# EAGLE board asset-tracker (EAGLE 7.5.0)
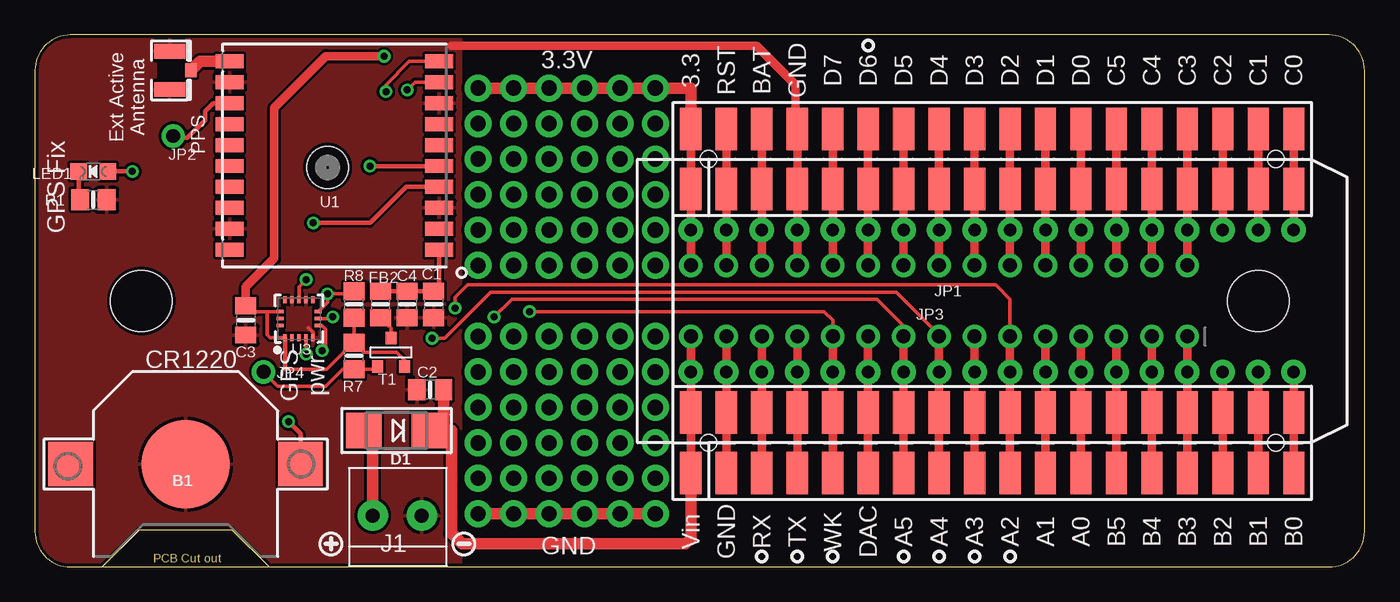
[diagram p0: board, top side]
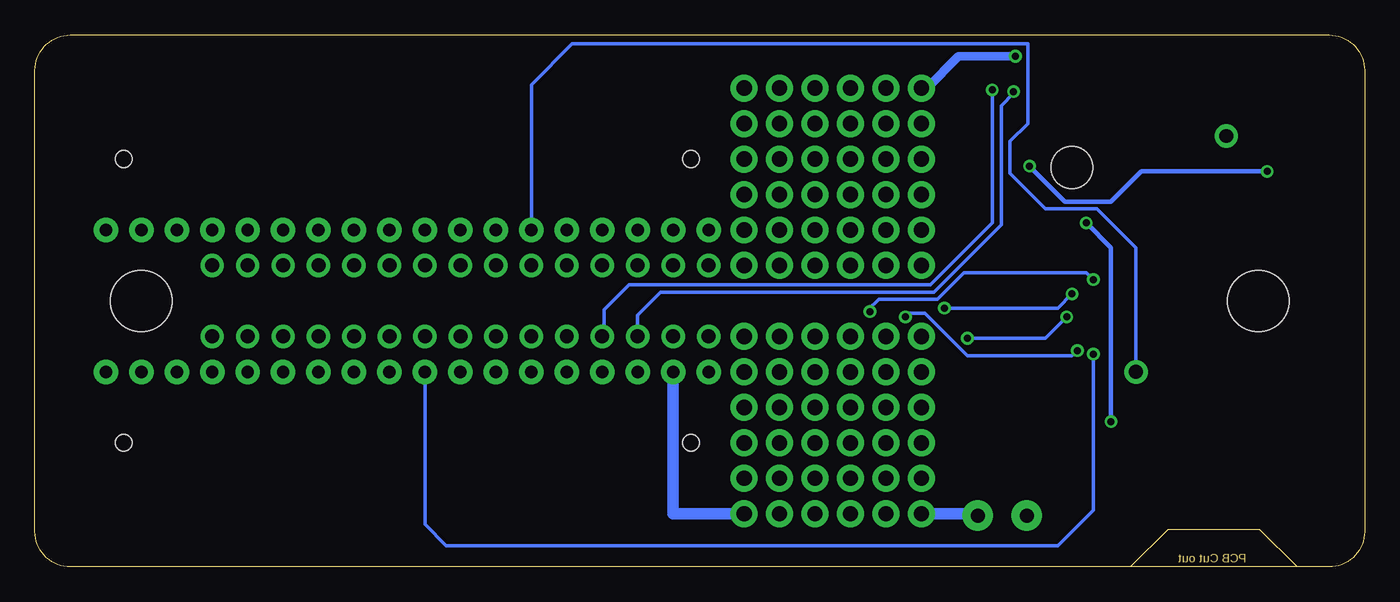
[diagram p1: board, bottom side, seen from below]

Size 95.25 x 38.1 mm. Coordinates in mm from the lower left corner, seen from the top.
Outline: 4.83,0 2.54,0 arc-90 0,2.54 0,35.56 arc-90 2.54,38.1 92.71,38.1 arc-90 95.25,35.56 95.25,2.54 arc-90 92.71,0 16.76,0
Outline: 4.83,0 16.76,0
Outline: 4.83,0 7.49,2.67 14.1,2.67 16.76,0
Copper layers (1*16): Top 0.035mm / dielectric 1.5mm / Bottom 0.035mm
Design rules "adafruit *": minimum track width 8mil, minimum drill 15.5mil, track to track 8mil, track to pad 8mil, pad to pad 8mil, via to via 8mil, smd to smd 8mil, copper to edge 10mil, drill to drill 8mil, minimum pad ring 10mil, minimum via ring 8mil, stop-mask expansion 2mil, vias tented up to drill 20mil, thermal gap 10mil
Holes 4.4 mm at 7.62,19.05 87.63,19.05

## Footprints (pad centres in the part's own frame; a part is rotated, then mirrored left to right if it is on the bottom)
CR1220 = smd 3.2 x 3.2: +$1 -8.225,0; +$2 8.225,0 | smd 6.35 x 6.35: - 0,0
0805-NO@1 = smd 1.24 x 1.5: 1 -0.95,0; 2 0.95,0
0805_10MGAP = smd 1.2 x 1.5: 1 -1.05,0; 2 1.05,0
SMADIODE = smd 2.54 x 2.54: A 2.349,0; C -2.349,0
1X2-3.5MM = drill 1 pad 2.184: 1 1.8,0; 2 -1.7,0
1X15_ROUND_70 = drill 1 pad 1.676: 1 -17.78,0; 2 -15.24,0; 3 -12.7,0; 4 -10.16,0; 5 -7.62,0; 6 -5.08,0; 7 -2.54,0; 8 0,0; 9 2.54,0; 10 5.08,0; 11 7.62,0; 12 10.16,0; 13 12.7,0; 14 15.24,0; 15 17.78,0
1X01_ROUND = drill 1 pad 1.676: 1 0,0
CHIPLED_0805_NOOUTLINE = smd 1.2 x 1.2: A 0,-1.05; C 0,1.05
0805-NO = smd 1.3 x 1.5: 1 -0.95,0; 2 0.95,0
SOT-23 = smd 0.787 x 0.889: 1 0.025,-1.016; 2 -0.94,1.016; 3 0.991,1.016
FGPMMOPA6H = smd 2 x 1: P$1 -7.5,6.75; P$2 -7.5,5.25; P$3 -7.5,3.75; P$4 -7.5,2.25; P$5 -7.5,0.75; P$6 -7.5,-0.75; P$7 -7.5,-2.25; P$8 -7.5,-3.75; P$9 -7.5,-5.25; P$10 -7.5,-6.75; P$11 7.5,-6.75; P$12 7.5,-5.25; P$13 7.5,-3.75; P$14 7.5,-2.25; P$15 7.5,-0.75; P$16 7.5,0.75; P$17 7.5,2.25; P$18 7.5,3.75; P$19 7.5,5.25; P$20 7.5,6.75 | hole 3: 0.5,0.85
LGA16_3X3MM = smd 0.5 x 0.25: 1 -1.35,1; 2 -1.35,0.5; 3 -1.35,0; 4 -1.35,-0.5; 5 -1.35,-1; 9 1.35,-1; 10 1.35,-0.5; 11 1.35,0; 12 1.35,0.5; 13 1.35,1 | smd 0.25 x 0.5: 6 -0.5,-1.35; 7 0,-1.35; 8 0.5,-1.35; 14 0.5,1.35; 15 0,1.35; 16 -0.5,1.35
ELECTRON_SMT = smd 3.048 x 1.524: 1A -12.319,21.59; 1B -8.001,21.59; 2A -12.319,19.05; 2B -8.001,19.05; 3A -12.319,16.51; 3B -8.001,16.51; 4A -12.319,13.97; 4B -8.001,13.97; 5A -12.319,11.43; 5B -8.001,11.43; 6A -12.319,8.89; 6B -8.001,8.89; 7A -12.319,6.35; 7B -8.001,6.35; 8A -12.319,3.81; 8B -8.001,3.81; 9A -12.319,1.27; 9B -8.001,1.27; 10A -12.319,-1.27; 10B -8.001,-1.27; 11A -12.319,-3.81; 11B -8.001,-3.81; 12A -12.319,-6.35; 12B -8.001,-6.35; 13A -12.319,-8.89; 13B -8.001,-8.89; 14A -12.319,-11.43; 14B -8.001,-11.43; 15A -12.319,-13.97; 15B -8.001,-13.97; 16A -12.319,-16.51; 16B -8.001,-16.51; 17A -12.319,-19.05; 17B -8.001,-19.05; 18A -12.319,-21.59; 18B -8.001,-21.59; 19A 12.319,-21.59; 19B 8.001,-21.59; 20A 12.319,-19.05; 20B 8.001,-19.05; 21A 12.319,-16.51; 21B 8.001,-16.51; 22A 12.319,-13.97; 22B 8.001,-13.97; 23A 12.319,-11.43; 23B 8.001,-11.43; 24A 12.319,-8.89; 24B 8.001,-8.89; 25A 12.319,-6.35; 25B 8.001,-6.35; 26A 12.319,-3.81; 26B 8.001,-3.81; 27A 12.319,-1.27; 27B 8.001,-1.27; 28A 12.319,1.27; 28B 8.001,1.27; 29A 12.319,3.81; 29B 8.001,3.81; 30A 12.319,6.35; 30B 8.001,6.35; 31A 12.319,8.89; 31B 8.001,8.89; 32A 12.319,11.43; 32B 8.001,11.43; 33A 12.319,13.97; 33B 8.001,13.97; 34A 12.319,16.51; 34B 8.001,16.51; 35A 12.319,19.05; 35B 8.001,19.05; 36A 12.319,21.59; 36B 8.001,21.59 | drill 0.889 pad 1.753: 1C -5.08,21.59; 2C -5.08,19.05; 3C -5.08,16.51; 4C -5.08,13.97; 5C -5.08,11.43; 6C -5.08,8.89; 7C -5.08,6.35; 8C -5.08,3.81; 9C -5.08,1.27; 10C -5.08,-1.27; 11C -5.08,-3.81; 12C -5.08,-6.35; 13C -5.08,-8.89; 14C -5.08,-11.43; 15C -5.08,-13.97; 16C -5.08,-16.51; 17C -5.08,-19.05; 18C -5.08,-21.59; 19C 5.08,-21.59; 20C 5.08,-19.05; 21C 5.08,-16.51; 22C 5.08,-13.97; 23C 5.08,-11.43; 24C 5.08,-8.89; 25C 5.08,-6.35; 26C 5.08,-3.81; 27C 5.08,-1.27; 28C 5.08,1.27; 29C 5.08,3.81; 30C 5.08,6.35; 31C 5.08,8.89; 32C 5.08,11.43; 33C 5.08,13.97; 34C 5.08,16.51; 35C 5.08,19.05; 36C 5.08,21.59 | hole 1.2: -10.16,20.32; 10.16,20.32; 10.16,-20.32; -10.16,-20.32
U.FL = smd 2.2 x 1.05: 1 0,1.375; 2 0,-1.375 | smd 0.8 x 1: 3 1.525,0

## Placement (x,y rotation side)
B1  CR1220  [CR1220]  10.79,7.37 180 top
C1  0.1uF  [0805-NO@1]  28.57,18.8 270 top
C2  10uF  [0805-NO@1]  28.32,12.7 180 top
C3  0.1uF  [0805_10MGAP]  15.11,17.65 270 top
C4  10uF  [0805-NO@1]  26.67,18.8 270 top
D1  [SMADIODE]  25.91,9.78 180 top
FB2  Ferrite  [0805-NO@1]  24.77,18.8 270 top
J1  1X2-3.5MM  [1X2-3.5MM]  25.91,3.68 0 top
JP1  [1X15_ROUND_70]  64.77,21.59 0 top
JP2  [1X01_ROUND]  9.91,30.86 0 top
JP3  [1X15_ROUND_70]  64.77,16.51 180 top
JP4  [1X01_ROUND]  16.38,13.97 0 top
LED1  RED  [CHIPLED_0805_NOOUTLINE]  4.19,28.32 90 top
R1  470-1K  [0805-NO]  4.19,26.29 180 top
R7  10K  [0805-NO]  22.86,15.11 90 top
R8  10K  [0805-NO]  22.86,18.8 270 top
T1  DMG3415  [SOT-23]  25.53,15.37 180 top
U1  FGPMMOPA6H  [FGPMMOPA6H]  21.46,29.46 180 top
U3  LIS3DHTR  [LGA16_3X3MM]  18.92,17.78 90 top
U$13  [SYMBOL_MINUS]  30.73,1.65 0 top
U$21  [SYMBOL_PLUS]  21.21,1.65 0 top
X1  ELECTRON  [ELECTRON_SMT]  68.58,19.05 90 top
X2  uFL  [U.FL]  9.65,35.56 0 top

## Library data of the parts
B1 C1-C4 D1 FB2 JP1-JP4 LED1 R1 R7 R8 U1 U3 U$13 U$21 X1 X2 = microbuilder
J1 = adafruit2
T1 = zetex; OC_FARNELL: unknown; OC_NEWARK: unknown

## Nets
1PPS: JP2.1 U1.P$13
3.3V: C3.1 JP1.1 R7.2 R8.2 T1.2 U3.1 U3.14 X1.36A X1.36B X1.36C
A0: JP3.4 X1.12A X1.12B X1.12C
A1: JP3.5 X1.11A X1.11B X1.11C
ACCEL_CS: JP3.6 R8.1 U3.8 X1.10A X1.10B X1.10C
ACCEL_INT1: JP3.11 U3.11 X1.5A X1.5B X1.5C
ACCEL_MISO: JP3.8 U3.7 X1.8A X1.8B X1.8C
ACCEL_MOSI: JP3.9 U3.6 X1.7A X1.7B X1.7C
ACCEL_SCK: JP3.7 U3.4 X1.9A X1.9B X1.9C
B3: JP3.1 X1.15A X1.15B X1.15C
B4: JP3.2 X1.14A X1.14B X1.14C
B5: JP3.3 X1.13A X1.13B X1.13C
C3: JP1.15 X1.22A X1.22B X1.22C
C4: JP1.14 X1.23A X1.23B X1.23C
C5: JP1.13 X1.24A X1.24B X1.24C
D0: JP1.12 X1.25A X1.25B X1.25C
D1: JP1.11 X1.26A X1.26B X1.26C
D2: JP1.10 X1.27A X1.27B X1.27C
D3: JP1.9 X1.28A X1.28B X1.28C
D4: JP1.8 X1.29A X1.29B X1.29C
D5: JP1.7 X1.30A X1.30B X1.30C
D6: JP1.6 JP4.1 R7.1 T1.3 X1.31A X1.31B X1.31C
D7: JP1.5 X1.32A X1.32B X1.32C
DAC: JP3.10 X1.6A X1.6B X1.6C
FIX: LED1.A U1.P$5
GND: B1.- C1.2 C2.2 C3.2 C4.2 J1.1 JP1.4 JP3.14 R1.1 U1.P$3 U1.P$8 U1.P$12 U1.P$19 U3.5 U3.10 U3.12 X1.2A X1.2B X1.2C X1.33A X1.33B X1.33C X2.1 X2.2
N$1: C1.1 C4.1 FB2.1 U1.P$1
N$2: LED1.C R1.2
N$4: U1.P$11 X2.3
N$8: C2.1 D1.C JP3.15 X1.1A X1.1B X1.1C
N$9: D1.A J1.2
N$10: X1.16A X1.16B X1.16C
N$11: X1.17A X1.17B X1.17C
N$12: X1.18A X1.18B X1.18C
N$13: X1.21A X1.21B X1.21C
N$14: X1.20A X1.20B X1.20C
N$15: X1.19A X1.19B X1.19C
RST: JP1.2 X1.35A X1.35B X1.35C
RX: JP3.13 U1.P$10 X1.3A X1.3B X1.3C
TX: JP3.12 U1.P$9 X1.4A X1.4B X1.4C
VBACKUP: B1.+$1 U1.P$4
VBAT: JP1.3 X1.34A X1.34B X1.34C
VCC: FB2.2 T1.1

## Tracks (layer width: path | path; a pad name or v marks a point on that pad's centre or on a via)
1PPS
  Top 0.305: U1.P$13 12.77,33.21 12.19,32.64 12.19,32 10.92,30.73 10.03,30.73 JP2.1
3.3V  (via drill 0.5, 1.1 pad 1.93)
  Top 0.254: U3.14 16.64,18.28 | 16.64,18.28 15.54,18.28 C3.1 | U3.1 16.84,16.43 16.64,16.64 16.64,18.28 | R8.2 R7.2 | R7.2 23.56,15.37 25.91,15.37 26.47,14.81 T1.2 | R7.2 22.79,16.06 20.89,14.16 17.92,14.16
  Top 0.305: U3.1 17.92,14.16
  Top 0.61: X1.36A X1.36B X1.36C JP1.1 | C3.1 15.11,20.07 17.14,22.1 17.14,32.89 20.83,36.58 v25.02,36.58
  Top 0.813: v31.75,34.29 v34.29,34.29 v36.83,34.29 v39.37,34.29 v41.91,34.29 v44.45,34.29 46.99,34.29 X1.36A
  Bottom 0.61: v31.75,34.29 31.37,34.29 29.08,36.58 v25.02,36.58
A0
  Top 0.61: X1.12A X1.12B X1.12C JP3.4
A1
  Top 0.61: JP3.5 X1.11C X1.11B X1.11A
ACCEL_CS  (via drill 0.5)
  Top 0.254: 22.23,19.68 22.35,19.68 | 22.35,19.68 22.8,19.68 R8.1 | 22.35,19.68 22.23,19.56 v20.95,19.56 20.95,18.96 U3.8 | JP3.6 69.85,19.18 68.83,20.19 30.99,20.19 30.1,19.3 v30.1,18.54
  Top 0.61: X1.10A X1.10B X1.10C JP3.6
  Bottom 0.254: v20.95,19.56 21.97,18.54 v30.1,18.54
ACCEL_INT1  (via drill 0.5)
  Top 0.254: U3.11 18.92,20.07 v19.43,20.57 | v35.43,18.29 56.52,18.29 57.15,17.65 JP3.11
  Top 0.61: X1.5A X1.5B X1.5C JP3.11
  Bottom 0.254: v19.43,20.57 19.94,21.08 28.7,21.08 30.61,19.18 34.8,19.18 35.56,18.41 v35.43,18.29
ACCEL_MISO  (via drill 0.5)
  Top 0.254: U3.7 21.21,17.78 v21.34,17.91 | v28.45,16.38 29.34,16.38 32.64,19.68 61.72,19.68 64.77,16.64 JP3.8
  Top 0.61: X1.8A X1.8B X1.8C JP3.8
  Bottom 0.254: v21.34,17.91 22.86,16.38 v28.45,16.38
ACCEL_MOSI  (via drill 0.5)
  Top 0.254: U3.6 20.57,17.28 20.83,17.02 20.83,15.75 v20.57,15.49 | JP3.9 62.23,17.27 60.33,19.18 34.16,19.18 v32.89,17.91
  Top 0.61: X1.7A X1.7B X1.7C JP3.9
  Bottom 0.254: v20.57,15.49 20.95,15.11 28.45,15.11 31.5,18.16 32.64,18.16 v32.89,17.91
ACCEL_SCK  (via drill 0.5)
  Top 0.254: U3.4 v19.42,15.25 v19.43,15.24
  Top 0.61: X1.9A X1.9B X1.9C JP3.7
  Bottom 0.254: v19.43,15.24 19.43,4.06 21.97,1.52 65.79,1.52 67.31,3.05 X1.9C
B3
  Top 0.61: JP3.1 X1.15C X1.15B 82.55,7.75 82.68,7.75 82.68,6.73 X1.15A
B4
  Top 0.61: X1.14A X1.14B X1.14C JP3.2
B5
  Top 0.61: JP3.3 X1.13C X1.13B X1.13A
C3
  Top 0.61: JP1.15 X1.22C X1.22B X1.22A
C4
  Top 0.61: X1.23A X1.23B X1.23C JP1.14
C5
  Top 0.61: JP1.13 X1.24C X1.24B X1.24A
D0
  Top 0.61: X1.25A X1.25B X1.25C JP1.12
D1
  Top 0.61: JP1.11 X1.26C X1.26B X1.26A
D2
  Top 0.61: X1.27A X1.27B X1.27C JP1.10
D3
  Top 0.61: X1.28A X1.28B X1.28C JP1.9
D4
  Top 0.61: JP1.8 X1.29C X1.29B X1.29A
D5
  Top 0.61: X1.30A X1.30B X1.30C JP1.7
D6
  Top 0.254: T1.3 24.35,14.16 R7.1 22.04,14.16 20.83,12.95 17.4,12.95 JP4.1
  Top 0.61: JP1.6 X1.31C X1.31B X1.31A
  Bottom 0.254: JP4.1 16.38,22.86 19.18,25.65 22.86,25.65 25.4,28.19 25.4,30.48 24.13,31.75 24.13,37.47 56.77,37.47 59.69,34.54 X1.31C 59.69,23.62
D7
  Top 0.61: JP1.5 X1.32C X1.32B X1.32A
DAC
  Top 0.61: X1.6A X1.6B X1.6C JP3.10
FIX  (via drill 0.5)
  Top 0.305: LED1.A v6.99,28.32 | v24,28.7 U1.P$5
  Bottom 0.305: v6.99,28.32 16,28.32 18.16,26.16 21.46,26.16 v24,28.7
GND  (via drill 1.1 pad 1.93)
  Top 0.254: U3.5 19.92,16.78 19.56,17.14
  Top 0.61: JP1.4 X1.33C X1.33B X1.33A 54.48,31.5 54.48,34.54 51.69,37.34 29.84,37.34 | X1.2A X1.2B X1.2C JP3.14
  Top 0.813: v44.45,3.81 v41.91,3.81 v39.37,3.81 v36.83,3.81 v34.29,3.81 v31.75,3.81
  Bottom 0.813: v44.45,3.81 49.53,3.81 X1.2C | J1.1 27.84,3.81 v31.75,3.81
  pour Top: 0,38.1 0,0 30.48,0 30.48,38.1
N$1
  Top 0.305: U1.P$1 28.96,20.13 C1.1 C4.1 FB2.1
N$2
  Top 0.305: LED1.C 3.14,26.39 R1.2
N$3  (via drill 1.1 pad 1.93)
  other vias: 44.45,24.13
N$4
  Top 0.813: X2.3 11.83,36.21 U1.P$11
N$5  (via drill 1.1 pad 1.93)
  other vias: 44.45,26.67
N$6  (via drill 1.1 pad 1.93)
  other vias: 44.45,29.21
N$7  (via drill 1.1 pad 1.93)
  other vias: 44.45,31.75
N$8
  Top 0.61: X1.1A X1.1B X1.1C JP3.15
  Top 0.813: C2.1 29.27,9.78 29.84,9.78 | 29.84,9.78 29.84,2.41 30.61,1.65 46.61,1.65 46.99,2.03 X1.1A | D1.C 29.84,9.78
N$9
  Top 0.813: J1.2 24.21,8.69 22.99,9.91 23.43,9.91 D1.A
N$10
  Top 0.61: X1.16C X1.16B X1.16A
N$11
  Top 0.61: X1.17A X1.17B X1.17C
N$12
  Top 0.61: X1.18C X1.18B X1.18A
N$13
  Top 0.61: X1.21A X1.21B X1.21C
N$14
  Top 0.61: X1.20C X1.20B X1.20A
N$15
  Top 0.61: X1.19A X1.19B X1.19C
N$21  (via drill 1.1 pad 1.93)
  other vias: 41.91,31.75
N$22  (via drill 1.1 pad 1.93)
  other vias: 41.91,29.21
N$23  (via drill 1.1 pad 1.93)
  other vias: 41.91,26.67
N$24  (via drill 1.1 pad 1.93)
  other vias: 41.91,24.13
N$25  (via drill 1.1 pad 1.93)
  other vias: 39.37,24.13
N$26  (via drill 1.1 pad 1.93)
  other vias: 39.37,26.67
N$27  (via drill 1.1 pad 1.93)
  other vias: 39.37,29.21
N$28  (via drill 1.1 pad 1.93)
  other vias: 39.37,31.75
N$29  (via drill 1.1 pad 1.93)
  other vias: 36.83,31.75
N$30  (via drill 1.1 pad 1.93)
  other vias: 36.83,29.21
N$31  (via drill 1.1 pad 1.93)
  other vias: 36.83,26.67
N$32  (via drill 1.1 pad 1.93)
  other vias: 36.83,24.13
N$33  (via drill 1.1 pad 1.93)
  other vias: 34.29,24.13
N$34  (via drill 1.1 pad 1.93)
  other vias: 34.29,26.67
N$35  (via drill 1.1 pad 1.93)
  other vias: 34.29,29.21
N$36  (via drill 1.1 pad 1.93)
  other vias: 34.29,31.75
N$37  (via drill 1.1 pad 1.93)
  other vias: 31.75,31.75
N$38  (via drill 1.1 pad 1.93)
  other vias: 31.75,29.21
N$39  (via drill 1.1 pad 1.93)
  other vias: 31.75,26.67
N$40  (via drill 1.1 pad 1.93)
  other vias: 31.75,24.13
N$41  (via drill 1.1 pad 1.93)
  other vias: 31.75,21.59
N$42  (via drill 1.1 pad 1.93)
  other vias: 34.29,21.59
N$43  (via drill 1.1 pad 1.93)
  other vias: 36.83,21.59
N$44  (via drill 1.1 pad 1.93)
  other vias: 39.37,21.59
N$45  (via drill 1.1 pad 1.93)
  other vias: 41.91,21.59
N$46  (via drill 1.1 pad 1.93)
  other vias: 44.45,21.59
N$48  (via drill 1.1 pad 1.93)
  other vias: 44.45,16.51
N$49  (via drill 1.1 pad 1.93)
  other vias: 44.45,13.97
N$50  (via drill 1.1 pad 1.93)
  other vias: 44.45,11.43
N$51  (via drill 1.1 pad 1.93)
  other vias: 44.45,8.89
N$52  (via drill 1.1 pad 1.93)
  other vias: 44.45,6.35
N$61  (via drill 1.1 pad 1.93)
  other vias: 31.75,6.35
N$62  (via drill 1.1 pad 1.93)
  other vias: 31.75,8.89
N$63  (via drill 1.1 pad 1.93)
  other vias: 31.75,11.43
N$64  (via drill 1.1 pad 1.93)
  other vias: 31.75,13.97
N$65  (via drill 1.1 pad 1.93)
  other vias: 31.75,16.51
N$68  (via drill 1.1 pad 1.93)
  other vias: 34.29,16.51
N$69  (via drill 1.1 pad 1.93)
  other vias: 34.29,13.97
N$70  (via drill 1.1 pad 1.93)
  other vias: 34.29,11.43
N$71  (via drill 1.1 pad 1.93)
  other vias: 34.29,8.89
N$72  (via drill 1.1 pad 1.93)
  other vias: 34.29,6.35
N$77  (via drill 1.1 pad 1.93)
  other vias: 41.91,6.35
N$78  (via drill 1.1 pad 1.93)
  other vias: 41.91,8.89
N$79  (via drill 1.1 pad 1.93)
  other vias: 41.91,11.43
N$80  (via drill 1.1 pad 1.93)
  other vias: 41.91,13.97
N$81  (via drill 1.1 pad 1.93)
  other vias: 41.91,16.51
N$85  (via drill 1.1 pad 1.93)
  other vias: 36.83,16.51
N$86  (via drill 1.1 pad 1.93)
  other vias: 39.37,16.51
N$87  (via drill 1.1 pad 1.93)
  other vias: 39.37,13.97
N$88  (via drill 1.1 pad 1.93)
  other vias: 36.83,13.97
N$89  (via drill 1.1 pad 1.93)
  other vias: 36.83,11.43
N$90  (via drill 1.1 pad 1.93)
  other vias: 39.37,11.43
N$91  (via drill 1.1 pad 1.93)
  other vias: 39.37,8.89
N$92  (via drill 1.1 pad 1.93)
  other vias: 36.83,8.89
N$93  (via drill 1.1 pad 1.93)
  other vias: 36.83,6.35
N$94  (via drill 1.1 pad 1.93)
  other vias: 39.37,6.35
RST
  Top 0.61: X1.35A X1.35B X1.35C JP1.2
RX  (via drill 0.5)
  Top 0.254: U1.P$10 26.82,36.21 25.15,34.54 v25.15,34.04
  Top 0.61: X1.3A X1.3B X1.3C JP3.13
  Bottom 0.254: v25.15,34.04 25.15,33.91 26.04,33.02 26.04,24.51 30.86,19.68 50.42,19.68 52.07,18.03 JP3.13
TX  (via drill 0.5)
  Top 0.254: U1.P$9 27.22,34.71 v26.67,34.16
  Top 0.61: X1.4A X1.4B X1.4C JP3.12
  Bottom 0.254: v26.67,34.16 26.67,24.64 31.11,20.19 52.7,20.19 54.48,18.41 54.48,16.64 JP3.12
VBACKUP  (via drill 0.5)
  Top 0.305: U1.P$4 26.58,27.21 24,24.64 v19.94,24.64 | v18.16,10.41 19.02,9.55 B1.+$1
  Bottom 0.305: v19.94,24.64 18.16,22.86 v18.16,10.41
VBAT
  Top 0.61: X1.34A X1.34B X1.34C JP1.3
VCC
  Top 0.254: FB2.2 25.5,17.11 T1.1

## Text on the board
Dimension: PCB Cut out
tPlace: 3.3V | 3.3 | RST | BAT | GND | D7 | D6 | D5 | D4 | D3 | D2 | D1 | D0 | C5 | C4 | C3 | C2 | C1 | C0 | Ext Active / Antenna | PPS | GPS Fix | CR1220 | GPS / pwr | Vin | GND | RX | TX | WK | DAC | A5 | A4 | A3 | A2 | A1 | A0 | B5 | B4 | B3 | B2 | B1 | B0 | GND
tDocu: Reference Designs ARE PROVIDED "AS IS" AND "WITH ALL FAULTS. PARTICLE INDUSTRIES, INC / ("PARTICLE") DISCLAIMS ALL OTHER WARRANTIES, EXPRESS OR IMPLIED, REGARDING / PRODUCTS OR THE REFERENCE DESIGNS, INCLUDING BUT NOT LIMITED TO, ANY / IMPLIED WARRANTIES OF MERCHANTABILITY, FITNESS FOR A PARTICULAR PURPOSE, / OR NON-INFRINGEMENT. / / Particle may make changes to specifications and product descriptions at any / time, without notice. The Customer must not rely on the absence or / characteristics of any features or instructions marked "reserved" or / "undefined." Particle reserves these for future definition and shall have / no responsibility whatsoever for conflicts or incompatibilities arising / from future changes to them. The product information on the Web Site or / Materials is subject to change without notice. Do not finalize a design / with this information. / Particle is a registered trademark.